# EAGLE board ATMEGA328P-AU Board (EAGLE 9.6.2)
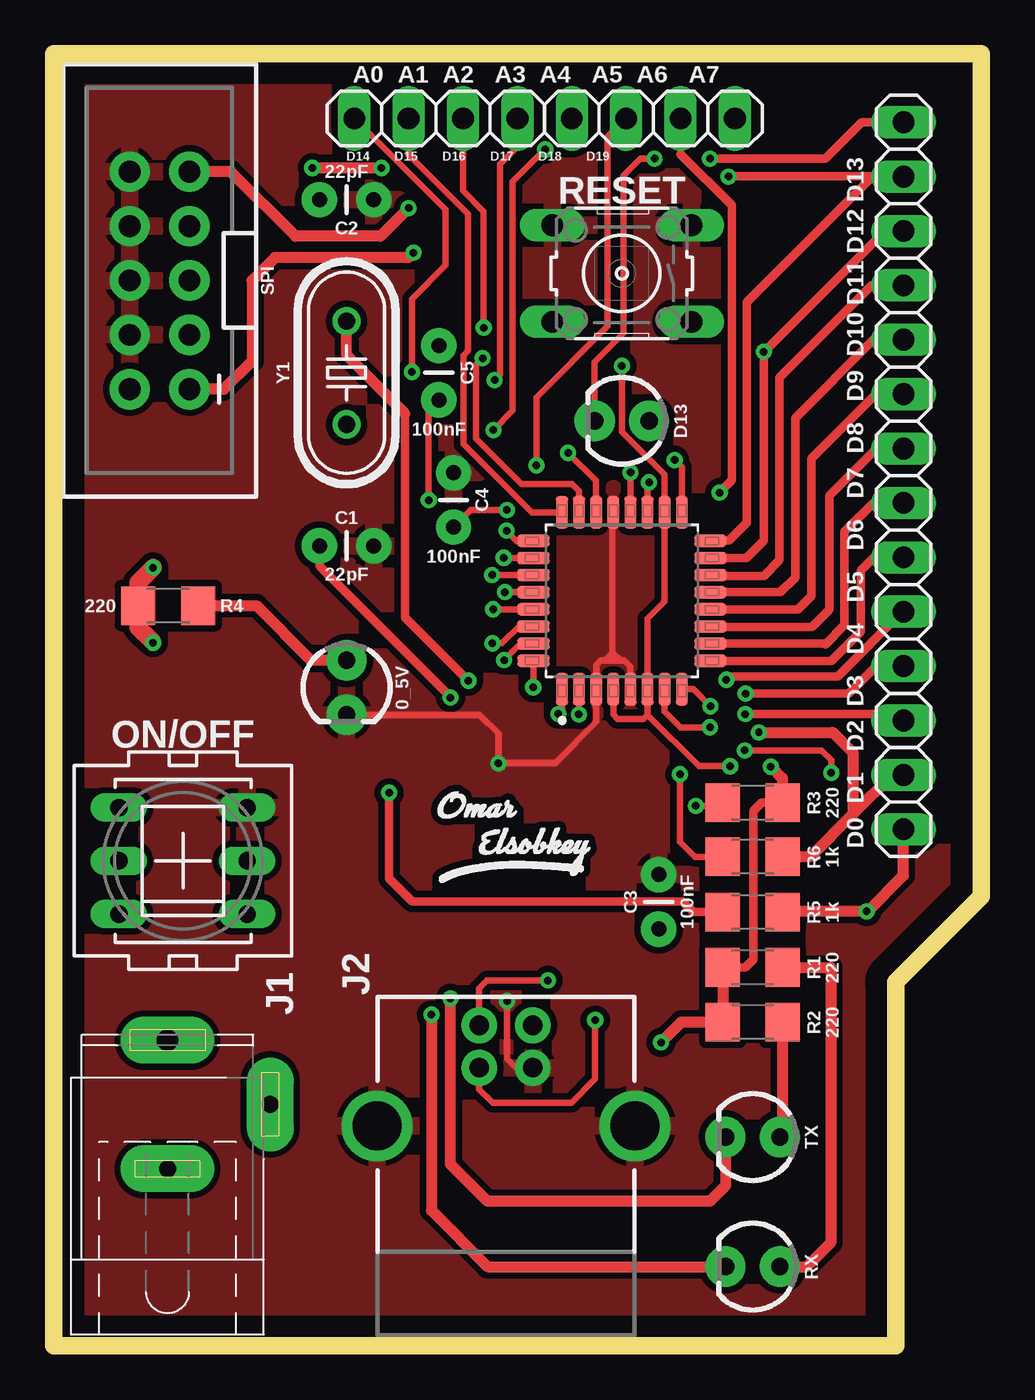
[diagram p0: board, top side]
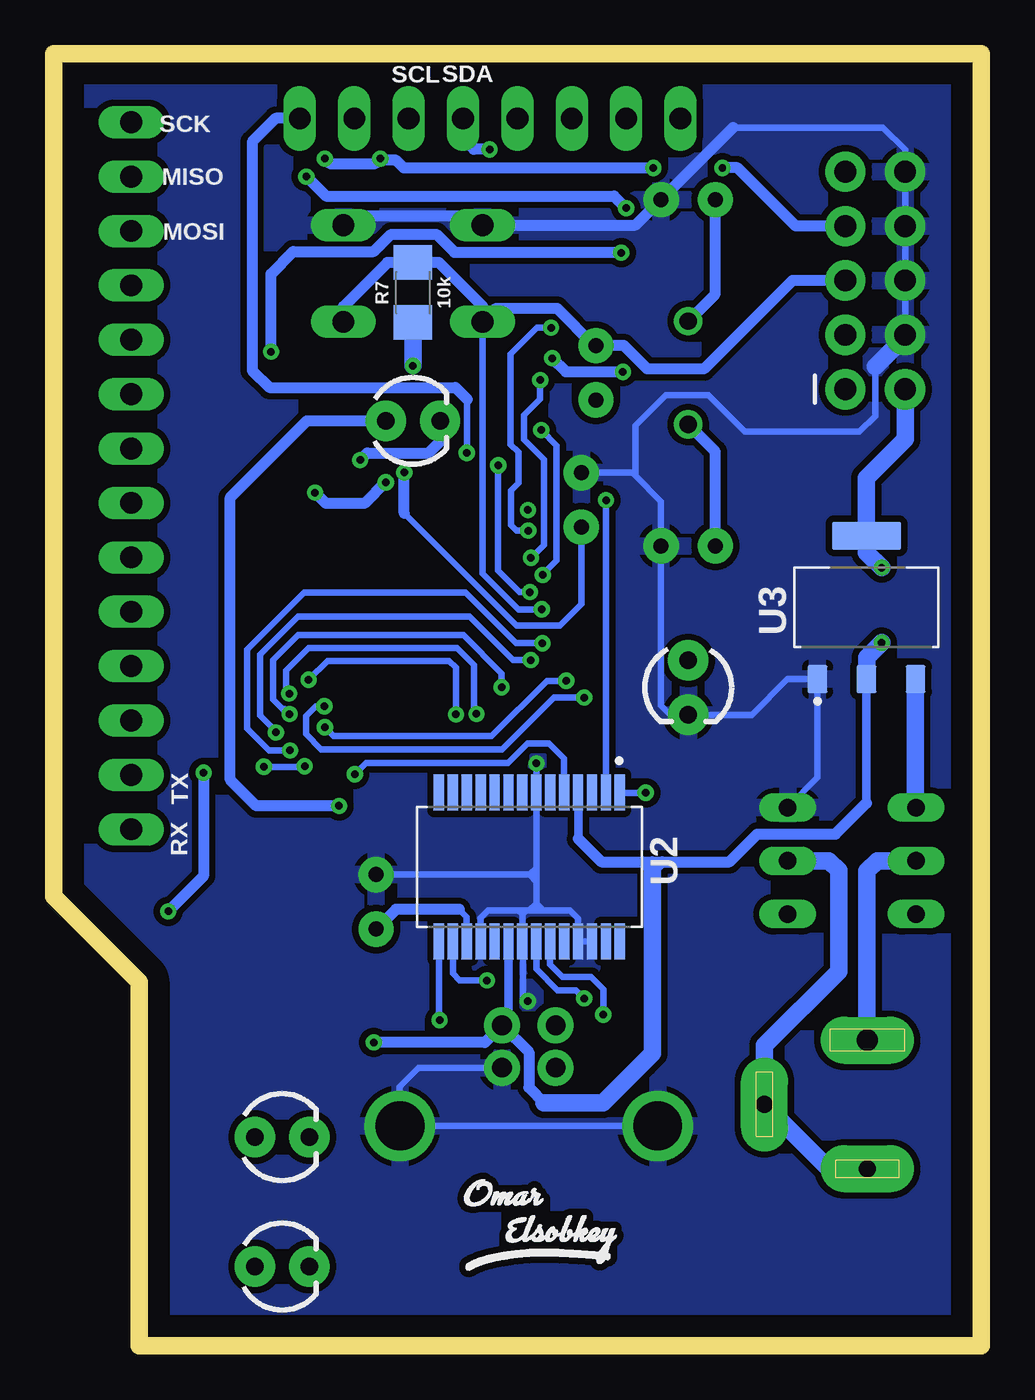
[diagram p1: board, bottom side, seen from below]

Size 43.33 x 60.36 mm. Coordinates in mm from the lower left corner, seen from the top.
Outline: 0,0 39.33,0 39.33,17 43.33,21 43.33,60.36 0,60.36 0,0
Copper layers (1*16): Top 0.035mm / dielectric 1.5mm / Bottom 0.035mm
Design rules "default *": minimum track width 0.3mm, minimum drill 0.3mm, track to track 0.3mm, track to pad 0.15mm, pad to pad 0.15mm, via to via 0.2mm, smd to smd 0.15mm, copper to edge 40mil, drill to drill 6mil, minimum pad ring 10mil, minimum via ring 8mil, stop-mask expansion 4mil, vias tented up to drill 0mil, thermal gap 10mil

## Footprints (pad centres in the part's own frame; a part is rotated, then mirrored left to right if it is on the bottom)
LED_3MM = drill 0.813 pad 1.88: A -1.27,0; K 1.27,0
CAP-PTH-2.54 = drill 0.7 pad 1.651: 1 -1.27,0; 2 1.27,0
SPC4077 = drill 0.8 pad 2.184 long: 1 -3,0; 2 0,-4.8 | drill 1 pad 2.184 long: 3 3,0
USB-B-PTH = drill 0.914 pad 1.676: D+ 4,1.25; D- 5.981,1.25; GND 4,-1.25; VBUS 5.981,-1.25 | drill 2.286: SHLD1 1.282,-6.02; SHLD2 1.282,6.02
1X14 = drill 1.016 long: 1 -16.51,0; 2 -13.97,0; 3 -11.43,0; 4 -8.89,0; 5 -6.35,0; 6 -3.81,0; 7 -1.27,0; 8 1.27,0; 9 3.81,0; 10 6.35,0; 11 8.89,0; 12 11.43,0; 13 13.97,0; 14 16.51,0
1X08 = drill 1.016 long: 1 -8.89,0; 2 -6.35,0; 3 -3.81,0; 4 -1.27,0; 5 1.27,0; 6 3.81,0; 7 6.35,0; 8 8.89,0
PVA2R = drill 0.813 long: 1 -2.997,2.489; 2 -2.997,0; 3 -2.997,-2.489; 4 2.997,2.489; 5 2.997,0; 6 2.997,-2.489
1206 = smd 1.6 x 1.8: 1 -1.4,0; 2 1.4,0
B3F-10XX = drill 1.016 long: 1 -3.251,2.261; 2 3.251,2.261; 3 -3.251,-2.261; 4 3.251,-2.261
2X5-SHROUDED_LOCK = drill 1.016 pad 1.88: 1 -1.397,5.08; 2 1.397,5.08; 3 -1.397,2.54; 4 1.397,2.54; 5 -1.397,0; 6 1.397,0; 7 -1.397,-2.54; 8 1.397,-2.54; 9 -1.397,-5.08; 10 1.397,-5.08
TQFP-32 = smd 1.5 x 0.57: 1 -4.13,2.8; 2 -4.13,2; 3 -4.13,1.2; 4 -4.13,0.4; 5 -4.13,-0.4; 6 -4.13,-1.2; 7 -4.13,-2; 8 -4.13,-2.8; 17 4.13,-2.8; 18 4.13,-2; 19 4.13,-1.2; 20 4.13,-0.4; 21 4.13,0.4; 22 4.13,1.2; 23 4.13,2; 24 4.13,2.8 | smd 0.57 x 1.5: 9 -2.8,-4.13; 10 -2,-4.13; 11 -1.2,-4.13; 12 -0.4,-4.13; 13 0.4,-4.13; 14 1.2,-4.13; 15 2,-4.13; 16 2.8,-4.13; 25 2.8,4.13; 26 2,4.13; 27 1.2,4.13; 28 0.4,4.13; 29 -0.4,4.13; 30 -1.2,4.13; 31 -2,4.13; 32 -2.8,4.13
SSOP-28 = smd 1.68 x 0.48: 1 -3.47,4.225; 2 -3.47,3.575; 3 -3.47,2.925; 4 -3.47,2.275; 5 -3.47,1.625; 6 -3.47,0.975; 7 -3.47,0.325; 8 -3.47,-0.325; 9 -3.47,-0.975; 10 -3.47,-1.625; 11 -3.47,-2.275; 12 -3.47,-2.925; 13 -3.47,-3.575; 14 -3.47,-4.225; 15 3.47,-4.225; 16 3.47,-3.575; 17 3.47,-2.925; 18 3.47,-2.275; 19 3.47,-1.625; 20 3.47,-0.975; 21 3.47,-0.325; 22 3.47,0.325; 23 3.47,0.975; 24 3.47,1.625; 25 3.47,2.275; 26 3.47,2.925; 27 3.47,3.575; 28 3.47,4.225
AMS1117-5.0 = smd 0.93 x 1.31: 1 -2.29,-3.345; 2 0,-3.345; 3 2.29,-3.345 | smd 3.24 x 1.31: 4 0,3.345
HC49U = drill 0.813: 1 -2.413,0; 2 2.413,0

## Placement (x,y rotation side)
0_5V  [LED_3MM]  13.69,30.75 270 top
C1  22pF  [CAP-PTH-2.54]  13.69,37.36 0 top
C2  22pF  [CAP-PTH-2.54]  13.69,53.53 180 top
C3  100nF  [CAP-PTH-2.54]  28.27,20.74 90 top
C4  100nF  [CAP-PTH-2.54]  18.68,39.51 270 top
C5  100nF  [CAP-PTH-2.54]  18,45.45 270 top
D13  [LED_3MM]  26.54,43.21 180 top
J1  [SPC4077]  5.32,11.28 90 top
J2  [USB-B-PTH]  21.13,8.99 90 top
JP1  [1X14]  39.7,40.64 270 top
JP2  [1X08]  22.94,57.33 180 top
ON/OFF  [PVA2R]  6.04,22.66 0 top
R1  220  [1206]  32.65,17.68 180 top
R2  220  [1206]  32.65,15.12 180 top
R3  220  [1206]  32.65,25.38 0 top
R4  220  [1206]  5.36,34.57 180 top
R5  1k  [1206]  32.65,20.26 180 top
R6  1k  [1206]  32.65,22.84 180 top
R7  10k  [1206]  26.54,49.2 90 bottom
RESET  [B3F-10XX]  26.54,50.09 180 top
RX  [LED_3MM]  32.65,3.71 180 top
SPI  [2X5-SHROUDED_LOCK]  4.95,49.76 180 top
TX  [LED_3MM]  32.65,9.75 180 top
U1  ATMEGA328P-AU  [TQFP-32]  26.54,34.8 90 top
U2  FT232RL-REEL  [SSOP-28]  21.11,22.37 270 bottom
U3  AMS1117-5.0  [AMS1117-5.0]  5.36,34.49 0 bottom
U$1  [OMAR_ELSOBKEY_X0.5]  21.16,23.57 0 top
U$2  [OMAR_ELSOBKEY_X0.5]  20.93,5.46 0 bottom
Y1  [HC49U]  13.69,45.45 90 top

## Library data of the parts
0_5V D13 RX TX = SparkFun-LED; PROD_ID: DIO-08794
C1-C5 = SparkFun-Capacitors; PROD_ID: CAP-09128
J1 = con-jack; OC_FARNELL: unknown; OC_NEWARK: unknown
J2 = SparkFun-Connectors; PROD_ID: CONN-08278; SF_ID: PRT-00139
JP1 JP2 = pinhead
ON/OFF = switch-misc
R1-R7 = SparkFun-Resistors
RESET = switch-omron; MPN: B3F-1000; OC_FARNELL: 176432; OC_NEWARK: 36M3542
SPI = SparkFun-Connectors; PROD_ID: CONN-08671; SF_ID: PRT-08506
U1 = Microcontroller; CREATED_BY: PCBLayout.com; DIGIKEY_PART_NUMBER: ATMEGA328P-AU-ND; MANUFACTURER: Microchip Technology; MPN: ATMEGA328P-AU; PACKAGE: TQFP-32
U2 = IC; CREATED_BY: PCBLayout.com; DIGI-KEYPARTNUMBER: 768-1007-1-ND; MANUFACTURER: FTDI, Future Technology Devices International Ltd; MPN: FT232RL-REEL; PACKAGE: 28-SSOP
U3 = AMS1117-5.0; AVAILABILITY: Unavailable; DESCRIPTION: Sot223/Pkg 1-Amp 5-Volt Low Drop Out Voltage Regulatator; MF: Advanced Monolithic Systems; MP: AMS1117-5.0; PACKAGE: None; PRICE: None
U$1 U$2 = Logos
Y1 = SparkFun-Clocks

## Nets
3V3: C3.1 U2.17
+5V: J2.VBUS R1.2 R2.2 R3.2 R4.2 R7.1 SPI.2 U1.4 U1.6 U1.18 U2.4 U2.20 U3.2 U3.4
A0/D14: JP2.8 U1.23
A1/D15: JP2.7 U1.24
A2/D16: JP2.6 U1.25
A3/D17: JP2.5 U1.26
A4/D18/SDA: JP2.4 U1.27
A5/D19/SCL: JP2.3 U1.28
A6: JP2.2 U1.19
A7: JP2.1 U1.22
AREF: C4.2 U1.20
CBUS0: RX.K U2.23
CBUS1: TX.K U2.22
D0/RX: JP1.14 R5.1 U1.30
D1/TX: JP1.13 R6.1 U1.31
D2: JP1.12 U1.32
D3: JP1.11 U1.1
D4: JP1.10 U1.2
D5: JP1.9 U1.9
D6: JP1.8 U1.10
D7: JP1.7 U1.11
D8: JP1.6 U1.12
D9: JP1.5 U1.13
D10: JP1.4 U1.14
D11/MOSI: JP1.3 SPI.1 U1.15
D12/MISO: JP1.2 SPI.9 U1.16
D13/SCK: D13.K JP1.1 SPI.7 U1.17
DTR: C5.2 U2.2
GND: 0_5V.K C1.2 C2.1 C3.2 C4.1 J2.GND J2.SHLD1 J2.SHLD2 ON/OFF.4 RESET.3 RESET.4 SPI.4 SPI.6 SPI.8 SPI.10 U1.3 U1.5 U1.21 U2.7 U2.18 U2.21 U2.25 U2.26 U3.1
N$1: R1.1 RX.A
N$2: R2.1 TX.A
N$3: J1.3 ON/OFF.2
N$4: D13.A R3.1
N$5: J2.D- U2.16
N$6: J1.1 J1.2 ON/OFF.5
N$8: ON/OFF.1 U3.3
N$9: 0_5V.A R4.1
OSC1: C1.1 U1.8 Y1.1
OSC2: C2.2 U1.7 Y1.2
RESET: C5.1 R7.2 RESET.1 RESET.2 SPI.5 U1.29
RX: R5.2 U2.1
TX: R6.2 U2.5
USBDP: J2.D+ U2.15

## Tracks (layer width: path | path; a pad name or v marks a point on that pad's centre or on a via)
3V3
  Bottom 0.3: U2.17 24.03,20.05 24.38,20.4
  Bottom 0.508: 24.38,20.4 27.34,20.4 C3.1
+5V  (via drill 0.35)
  Top 0.3: R2.2 31.25,16.27 | 27.74,29.47 U1.6 27.74,33.97 28.54,34.77 U1.18 28.54,40.69 26.54,42.69 v26.54,45.77 | 27.74,29.47 27.56,29.29 26.34,29.29 26.14,29.48 U1.4 | v4.65,32.84 4.62,32.87 4.6,32.92 | 27.74,29.47 30.14,27.08 v31.6,27.08
  Top 0.406: R3.2 33.07,25.38 32.69,24.99 32.69,18.06 32.31,17.68 R1.2
  Top 0.508: R1.2 R2.2 29.32,15.12 v28.37,14.17 | v33.5,27.05 34.05,26.5 R3.2
  Top 0.813: v4.65,36.35 3.96,35.66 R4.2 3.96,33.56 4.6,32.92
  Bottom 0.3: 15.37,22.61 15.37,22.15 | U3.4 5.36,37.06 | 5.33,31.17 U3.2 | v31.6,27.08 31.64,27.03 33.49,27.03 v33.5,27.05 | v26.54,45.77
  Bottom 0.406: J2.VBUS 22.08,15.27 U2.20 | U2.4 18.82,23.68 | 5.36,25.35 U3.2
  Bottom 0.508: 18.82,23.68 17.75,22.61 15.82,22.61 | 15.82,22.61 15.37,22.61 14.91,22.61 | 14.91,22.61 11.76,22.61 10.47,23.9 6.81,23.9 5.36,25.35 | 15.82,22.61 15.37,22.15 14.91,22.61 | 20.42,11.35 21.13,12.06 21.13,13.72 J2.VBUS 23.18,14.17 v28.37,14.17
  Bottom 0.813: SPI.2 3.56,42.34 5.36,40.54 U3.4 | 15.37,22.15 15.37,13.66 17.68,11.35 20.42,11.35 | R7.1 v26.54,45.77 | 5.36,37.06 v4.65,36.35 | v4.65,32.84 5.33,32.16 5.33,31.17
A0/D14  (via drill 0.35)
  Top 0.3: JP2.8 18.31,53.06 18.31,50.47 16.74,48.9 v16.74,45.49 | U1.23 24.54,39.92 24.21,40.26 21.86,40.26 19.74,42.37 19.74,45.83 v20.04,46.13
  Bottom 0.508: v20.04,46.13 19.41,45.49 v16.74,45.49
A1/D15
  Top 0.3: U1.24 22.34,38.93 19.14,42.12 19.14,46.26 19.36,46.48 19.36,52.86 16.59,55.64 JP2.7
A2/D16  (via drill 0.35)
  Top 0.3: U1.25 21.64,37.6 v21.16,38.08 | JP2.6 19.13,53.95 20.09,52.98 v20.09,47.55
  Bottom 0.3: v21.16,38.08 21.72,38.08 21.97,38.33 21.97,39.94 21.62,40.29 21.62,41.74 21.98,42.1 21.98,46.31 20.74,47.55 v20.09,47.55
A3/D17  (via drill 0.35)
  Top 0.3: U1.26 v21.04,36.8 v21.03,36.8 | JP2.5 21.67,56.01 20.85,55.19 20.85,45.36 v20.6,45.11
  Bottom 0.3: v20.6,45.11 20.6,44.22 21.35,43.47 21.35,42.32 20.43,41.4 20.43,37.41 v21.03,36.8
A4/D18/SDA  (via drill 0.35)
  Top 0.3: v20.48,36.01 U1.27 | v22.96,55.88 21.45,54.36 21.45,43.67 v20.55,42.77
  Bottom 0.3: v20.55,42.77 19.83,42.05 19.83,36.69 20.51,36.01 v20.48,36.01
  Bottom 0.508: JP2.4 24.21,56.39 23.7,55.88 v22.96,55.88
A5/D19/SCL  (via drill 0.35)
  Top 0.3: JP2.3 25.88,56.46 25.88,47.62 22.56,44.3 v22.56,41.12 | U1.28 v21.08,35.2
  Bottom 0.3: v22.56,41.12 22.57,41.11 22.57,36.21 21.57,35.2 v21.08,35.2
A6  (via drill 0.35)
  Top 0.3: v27.81,40.34 27.74,40.26 U1.19 | v31.12,39.85 31.12,39.88 | 29.29,55.65 JP2.2
  Top 0.406: 31.12,39.88 31.67,40.44 31.67,53.26 29.29,55.65
  Bottom 0.508: v27.81,40.34 28.8,39.34 30.61,39.34 v31.12,39.85
A7  (via drill 0.35)
  Top 0.3: v24.03,41.71 25.32,40.41 25.32,38.95 U1.22
  Bottom 0.3: v24.03,41.71 24.03,41.75 24.02,41.77 24.02,44.21
  Bottom 0.508: 24.02,44.21 24.56,44.76 33.25,44.76 34.05,45.56 34.05,56.23 32.96,57.33 JP2.1
AREF  (via drill 0.35)
  Top 0.3: v21.18,39.04 19.48,39.04 C4.2 | U1.20 v26.94,40.79 v26.95,40.79
  Bottom 0.3: C4.2 18.68,34.66 19.69,33.66 21.72,33.66 26.95,38.89
  Bottom 0.508: 26.95,38.89 v26.95,40.79
CBUS0  (via drill 0.35)
  Top 0.508: v17.65,15.47 17.65,6.33 20.27,3.71 RX.K
  Bottom 0.3: U2.23 20.13,17.82 19.56,17.25 18.24,17.25 17.65,16.66 v17.65,15.47
CBUS1  (via drill 0.35)
  Top 0.508: TX.K 31.38,7.48 30.66,6.76 20.27,6.76 18.54,8.48 v18.54,16.23
  Bottom 0.3: v18.54,16.23 18.92,16.61 19.79,16.61 20.78,17.61 U2.22
D0/RX  (via drill 0.35)
  Top 0.3: R5.1 34.09,20.3 | 38.02,20.3 v37.97,20.3 | U1.30 21.74,33.6 20.96,32.82 v20.5,32.82 | v32.28,27.82 v32.29,27.81 35.87,27.81 36.32,27.36 v36.32,26.77
  Top 0.508: JP1.14 39.7,21.97 38.02,20.3 | v37.97,20.3 34.09,20.3
  Bottom 0.3: 32.33,27.82 v32.28,27.82 33.26,27.82 34.28,28.83 34.28,32.53 31.63,35.18 24.09,35.18 21.73,32.82 v20.5,32.82
  Bottom 0.508: v36.32,26.77 36.32,21.95 v37.97,20.3
D1/TX  (via drill 0.35)
  Top 0.3: U1.31 21.81,32.8 v21.04,32.03
  Top 0.508: JP1.13 39.17,26.67 37.34,24.84 | 37.34,24.84 35.34,22.84 R6.1 | v32.94,28.65 36.4,28.65 37.34,27.71 37.34,24.84
  Bottom 0.3: v21.04,32.03 21.87,32.03 23.9,34.06 31.9,34.06 33.68,32.29 33.68,29.44 32.94,28.7 v32.94,28.65
D2  (via drill 0.35)
  Top 0.3: U1.32 22.41,30.77 v22.4,30.76
  Top 0.406: v32.31,29.51 39.4,29.51 JP1.12
  Bottom 0.3: v32.31,29.51 32.54,29.74 32.63,29.74 33.08,30.19 33.08,32.04 31.92,33.2 24.19,33.2 22.4,31.41 v22.4,30.76
D3  (via drill 0.35)
  Top 0.3: JP1.11 38.46,31.75 | v23.58,29.52 23.74,29.68 U1.1
  Top 0.406: JP1.11 38.43,31.75 37.14,30.46 v32.32,30.46
  Bottom 0.3: v23.58,29.52 23.7,29.63 23.7,31.8 24.5,32.6 31.42,32.6 32.48,31.54 32.48,30.62 v32.32,30.46
D4  (via drill 0.35)
  Top 0.3: U1.2 v24.54,29.5 v24.54,29.49
  Top 0.406: v31.42,31.11 31.57,31.27 36.63,31.27 39.65,34.29 JP1.10
  Bottom 0.3: v24.54,29.49 24.54,31.67 24.86,32 30.54,32 v31.42,31.11
D5
  Top 0.3: 30.69,31.98 U1.9
  Top 0.406: JP1.9 38.31,36.83 37.7,36.22 37.7,33.35 36.32,31.98 30.69,31.98
D6
  Top 0.3: 36.01,32.8 36.04,32.77
  Top 0.406: JP1.8 38.28,39.37 36.94,38.04 36.94,33.67 36.04,32.77 | U1.10 36.01,32.8
D7
  Top 0.3: U1.11 30.69,33.58
  Top 0.406: JP1.7 38.43,41.91 36.22,39.7 36.22,34.4 35.41,33.58 30.69,33.58
D8
  Top 0.3: U1.12
  Top 0.406: JP1.6 38.41,44.45 35.4,41.44 35.4,35.01 34.77,34.39 U1.12
D9
  Top 0.406: JP1.5 38.29,46.99 34.64,43.34 34.64,35.88 33.95,35.2 U1.13
D10
  Top 0.3: 30.71,35.97 U1.14
  Top 0.406: JP1.4 38.23,49.53 33.91,45.21 33.91,36.7 33.17,35.97 30.71,35.97
D11/MOSI  (via drill 0.35)
  Top 0.3: v33.17,46.43 33.19,46.43
  Top 0.406: JP1.3 38.83,52.07 33.19,46.43 | U1.15 32.35,36.8 33.17,37.62 v33.17,46.43
  Top 0.508: v16.82,51.05 16.59,50.83 10.34,50.83 9.27,49.76 9.27,46 7.95,44.68 SPI.1
  Bottom 0.3: 16.84,51.08 v16.82,51.05
  Bottom 0.508: v33.17,46.43 33.17,50.06 32.13,51.1 28.37,51.1 27.56,51.92 25.45,51.92 24.61,51.08 16.84,51.08
D12/MISO  (via drill 0.35)
  Top 0.3: v31.52,54.61 31.55,54.63 | 39.68,54.63 JP1.2 | U1.16 30.69,37.62
  Top 0.406: JP1.2 38.25,54.61 32.39,48.74 32.39,38.46 31.55,37.62 30.69,37.62 | 31.55,54.63 39.68,54.63
  Top 0.508: v16.59,53.14 15.27,51.82 11.3,51.82 8.28,54.84 SPI.9
  Bottom 0.508: v31.52,54.61 30.61,53.7 17.15,53.7 v16.59,53.14
D13/SCK  (via drill 0.35)
  Top 0.3: v29.01,41.38 29.34,41.04 U1.17 | D13.K 25.27,45.95 26.62,47.3 26.62,54.66 27.41,55.45 v28.07,55.45
  Top 0.406: v30.66,55.45 36.04,55.45 37.74,57.15 JP1.1
  Top 0.508: v12.09,55.02 v15.32,55.02
  Bottom 0.508: D13.K 25.27,42.24 25.81,41.71 28.68,41.71 v29.01,41.38 | v30.66,55.45 30.43,55.22 28.3,55.22 v28.07,55.45 28.02,55.4 27.36,55.4 26.98,55.02 v15.32,55.02 | SPI.7 8.66,52.3 11.38,55.02 v12.09,55.02
DTR  (via drill 0.35)
  Top 0.3: v17.53,39.5 17.53,43.71 C5.2
  Bottom 0.3: U2.2 v17.53,39.49 v17.53,39.5
GND  (via drill 0.35)
  Top 0.3: v21.18,16.1 21.18,13.41 21.6,12.99 J2.GND | 0_5V.K 19.9,29.48 20.78,28.6 v20.78,27.2 20.78,27.23 23.44,27.23 25.34,29.13 U1.3 25.35,31.8 25.55,32 25.76,32 | U1.5 26.94,31.73 26.67,32 26.49,32 | 26.49,32 26.11,32 | 26.11,32 25.76,32 | U1.21 26.11,38.9 26.11,32.38 | 26.11,32.36 26.11,32 | 26.11,32.38 26.11,32.36 | 26.11,32.36 25.76,32 | 26.11,32.38 26.49,32
  Bottom 0.3: ON/OFF.4 7.65,26.54 U3.1 9.05,31.14 10.72,29.48 0_5V.K 14.53,29.48 14.96,29.91 C1.2 14.96,39.44 16.15,40.64 | J2.SHLD2 J2.SHLD1 27.18,10.3 27.18,12.09 26.28,12.99 J2.GND | U2.26 U2.25 18.83,19.98 19.2,20.34 20.45,20.34 | 20.45,20.34 20.78,20.34 | 20.78,20.34 21.11,20.34 | 21.23,20.34 21.41,20.34 | U2.18 23.38,20 23.04,20.34 21.64,20.34 | 21.41,20.34 21.64,20.34 | 21.41,20.34 21.43,20.32 21.43,20.14 | 21.43,20.14 U2.21 21.41,18.88 21.41,16.33 v21.18,16.1 | 21.43,20.14 21.64,20.34 | 21.43,20.14 21.23,20.34 | 20.78,22.33 U2.7 v20.78,27.2 | 20.78,22.33 20.78,22 | 20.78,22 20.78,21.69 | 20.78,21.69 20.78,20.68 | 20.78,20.68 20.78,20.35 20.78,20.34 | 20.78,20.68 21.11,20.34 | 21.11,20.34 21.23,20.34 | 20.78,20.68 20.45,20.34 | C3.2 21.11,22.01 | 21.11,22.01 20.8,22.01 20.78,22 | 21.11,22.01 20.78,22.33 | 21.11,22.01 20.79,21.69 20.78,21.69 | C4.1 16.29,40.78 16.15,40.64 | 11.59,56.9 4.6,56.9 3.56,55.85 SPI.10 SPI.8 SPI.6 SPI.4 3.56,47.14 | 16.15,40.64 16.15,42.98 14.73,44.4 12.75,44.4 11.05,42.7 5.69,42.7 4.95,43.43 4.95,45.74
  Bottom 0.508: RESET.3 29.36,52.78 23.72,52.78 RESET.4 16.14,52.35 C2.1 11.59,56.9
  Bottom 0.813: 4.95,45.74 3.56,47.14
  pour Top: -1.67,62 47.33,62 47.33,-2 -1.67,-2
  pour Bottom: -3.67,64 49.33,64 49.33,-4 -3.67,-4 -3.67,63
N$1
  Top 0.508: R1.1 36.3,17.68 36.3,4.83 35.18,3.71 RX.A
N$2
  Top 0.3: 34.05,9.88 TX.A
  Top 0.508: R2.1 34.05,9.88
N$3
  Bottom 0.3: 5.33,14.29 J1.3
  Bottom 0.813: ON/OFF.2 4.85,22.66 5.33,22.17 5.33,14.29
N$4  (via drill 0.35)
  Top 0.3: R3.1 31.1,25.22 v30,25.22
  Bottom 0.508: v30,25.22 33.86,25.22 35.08,26.44 35.08,39.62 31.49,43.21 D13.A
N$5  (via drill 0.35)
  Top 0.3: v23.09,17.07 20.24,17.07 19.88,16.71 J2.D-
  Bottom 0.3: U2.16 24.68,17.39 24.36,17.07 v23.09,17.07
N$6
  Bottom 0.508: 7.12,8.28 J1.1
  Bottom 0.813: ON/OFF.5 7.11,22.66 6.66,22.2 6.66,17.5 10.12,14.03 J1.2 7.12,8.28
N$8
  Bottom 0.3: 3.07,25.17 ON/OFF.1
  Bottom 0.813: U3.3 3.07,25.17
N$9
  Top 0.508: R4.1 9.48,34.57 12.04,32.02 0_5V.A
OSC1  (via drill 0.35)
  Top 0.3: U1.8 29.89,30.67 v30.68,29.87 | v18.54,30.28 18.54,30.3
  Top 0.406: 18.54,30.3 12.42,36.43 C1.1
  Bottom 0.3: v18.54,30.28 19.97,30.28 22.39,27.86 30.83,27.86 31.54,28.57 31.54,29.42 31.1,29.86 31.06,29.86 31.05,29.87 v30.68,29.87
  Bottom 0.508: C1.1 12.42,41.77 Y1.1
OSC2  (via drill 0.35)
  Top 0.3: U1.7 28.54,29.62 29.29,28.88 30.64,28.88 v30.66,28.9
  Top 0.406: v19.38,31.06 16.42,34.03 16.42,43.53
  Top 0.508: 16.42,43.53 13.69,46.26 Y1.2
  Bottom 0.3: v30.66,28.9 30.24,28.48 22.88,28.48 20.29,31.06 v19.38,31.06
  Bottom 0.508: Y1.2 12.42,49.13 C2.2
RESET  (via drill 0.35)
  Top 0.3: v20.53,34.4 v20.54,34.4 U1.29
  Bottom 0.3: C5.1 18.08,46.72 | v20.53,34.4 21.61,34.4 23.29,36.08 23.29,36.65
  Bottom 0.305: RESET.2 23.29,36.65
  Bottom 0.508: SPI.5 8.81,49.76 12.95,45.62 15.6,45.62 16.7,46.72 C5.1 | RESET.1 29.79,48.54 27.74,50.6 R7.2 25.33,50.6 23.29,48.55 RESET.2 22.66,48.45 19.82,48.45 18.08,46.72
RX  (via drill 0.35)
  Top 0.406: v15.67,25.83 15.67,21.84 16.75,20.77 29.37,20.77 29.88,20.26 R5.2
  Bottom 0.3: U2.1 v15.67,25.83
TX  (via drill 0.35)
  Top 0.3: R6.2 29.96,22.84 29.26,23.55 v29.26,26.7
  Bottom 0.3: 19.48,26.8 U2.5 19.48,27.43 20.19,28.14 21.2,28.14 22.11,27.23 28.73,27.23 v29.26,26.7
USBDP  (via drill 0.35)
  Top 0.3: v25.3,15.21 25.3,12.47 24.18,11.35 20.52,11.35 19.88,11.99 J2.D+
  Bottom 0.3: U2.15 25.33,15.25 v25.3,15.21

## Text on the board
tNames: A0 A1 A2 A3 A4 A5 A6 A7 | D14 D15 D16 D17 D18 D19 | D0 D1 D2 D3 D4 D5 D6 D7 D8 D9 D10 D11 D12 D13
bNames: SDA | SCL | SCK | MISO | MOSI | TX | RX